# Altium PCB Panel.PcbDoc
Units mil, origin at the board's own origin, x right, y up, seen from the top; angles counter-clockwise.
Board outline 8169.29 x 5688.98 mil, 2 copper layers (Top Layer, Bottom Layer), stack 59.417 mil thick; 12 components, 0 nets, 12 pads, 0 vias.
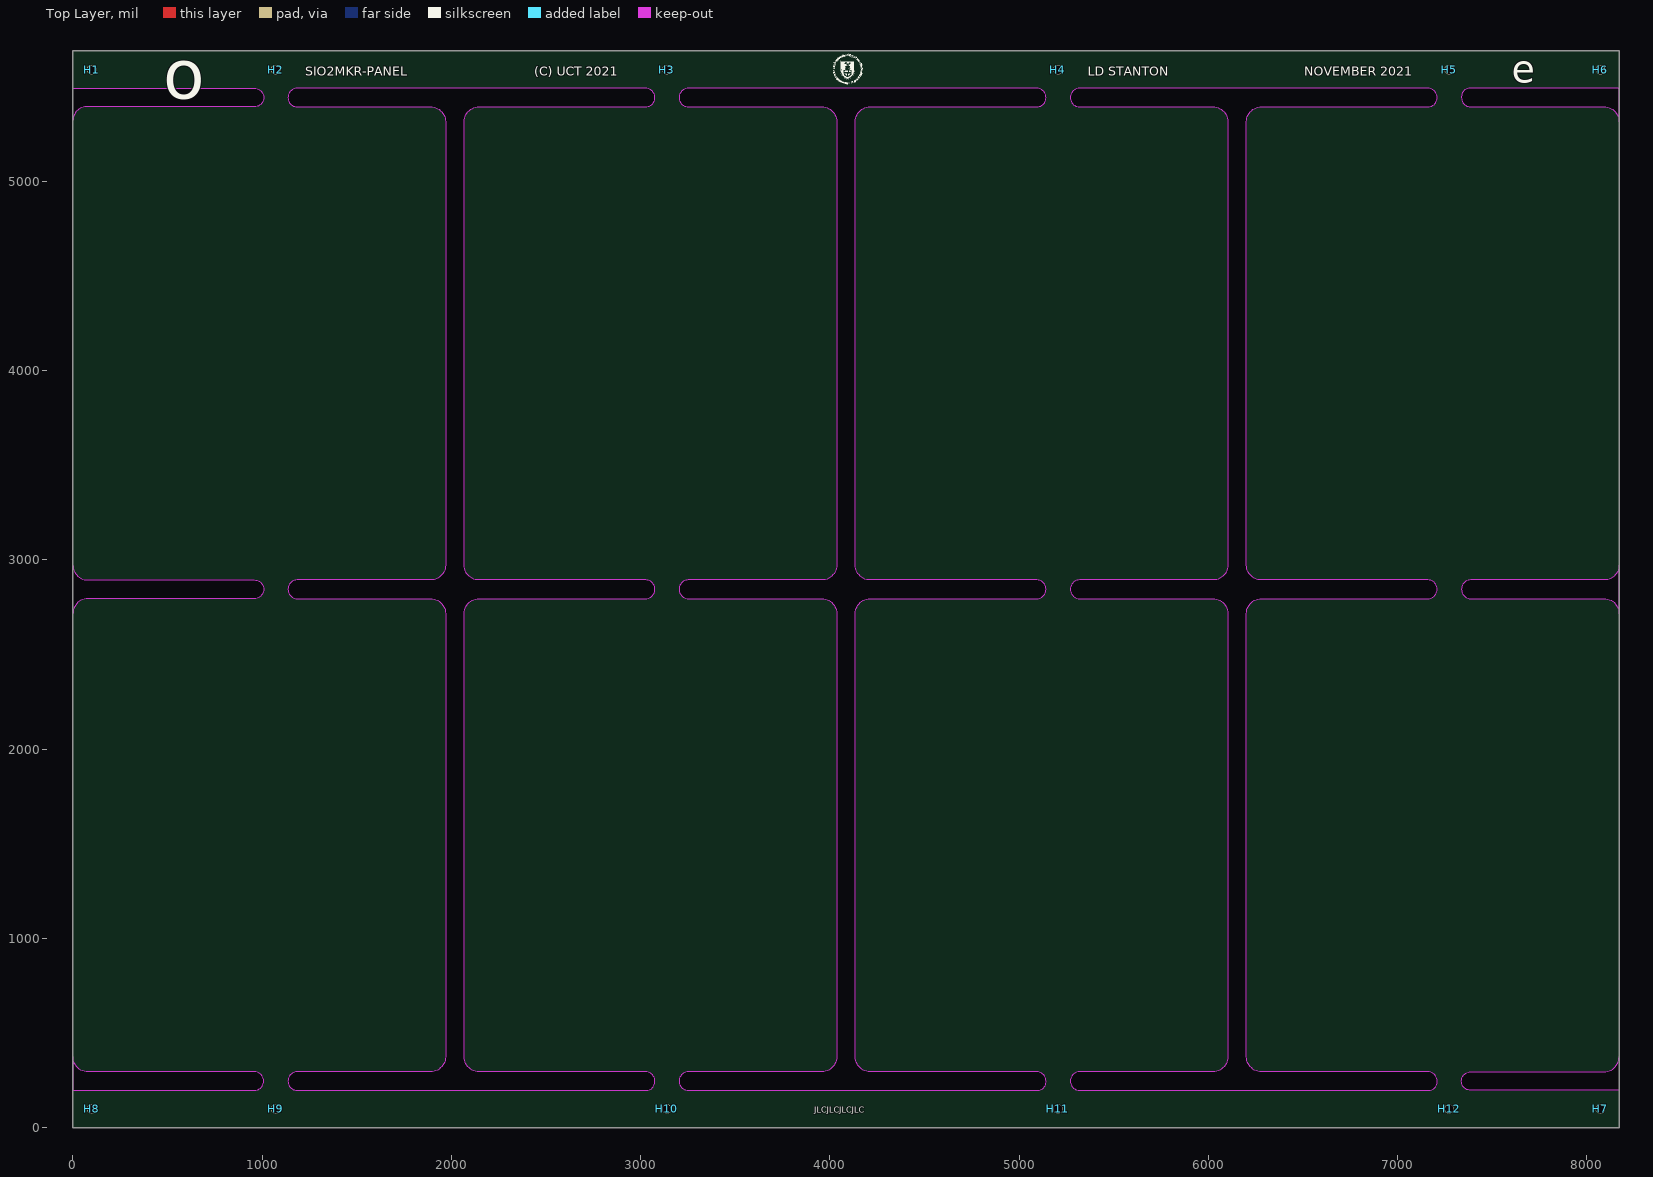
[diagram p0: Top Layer view]
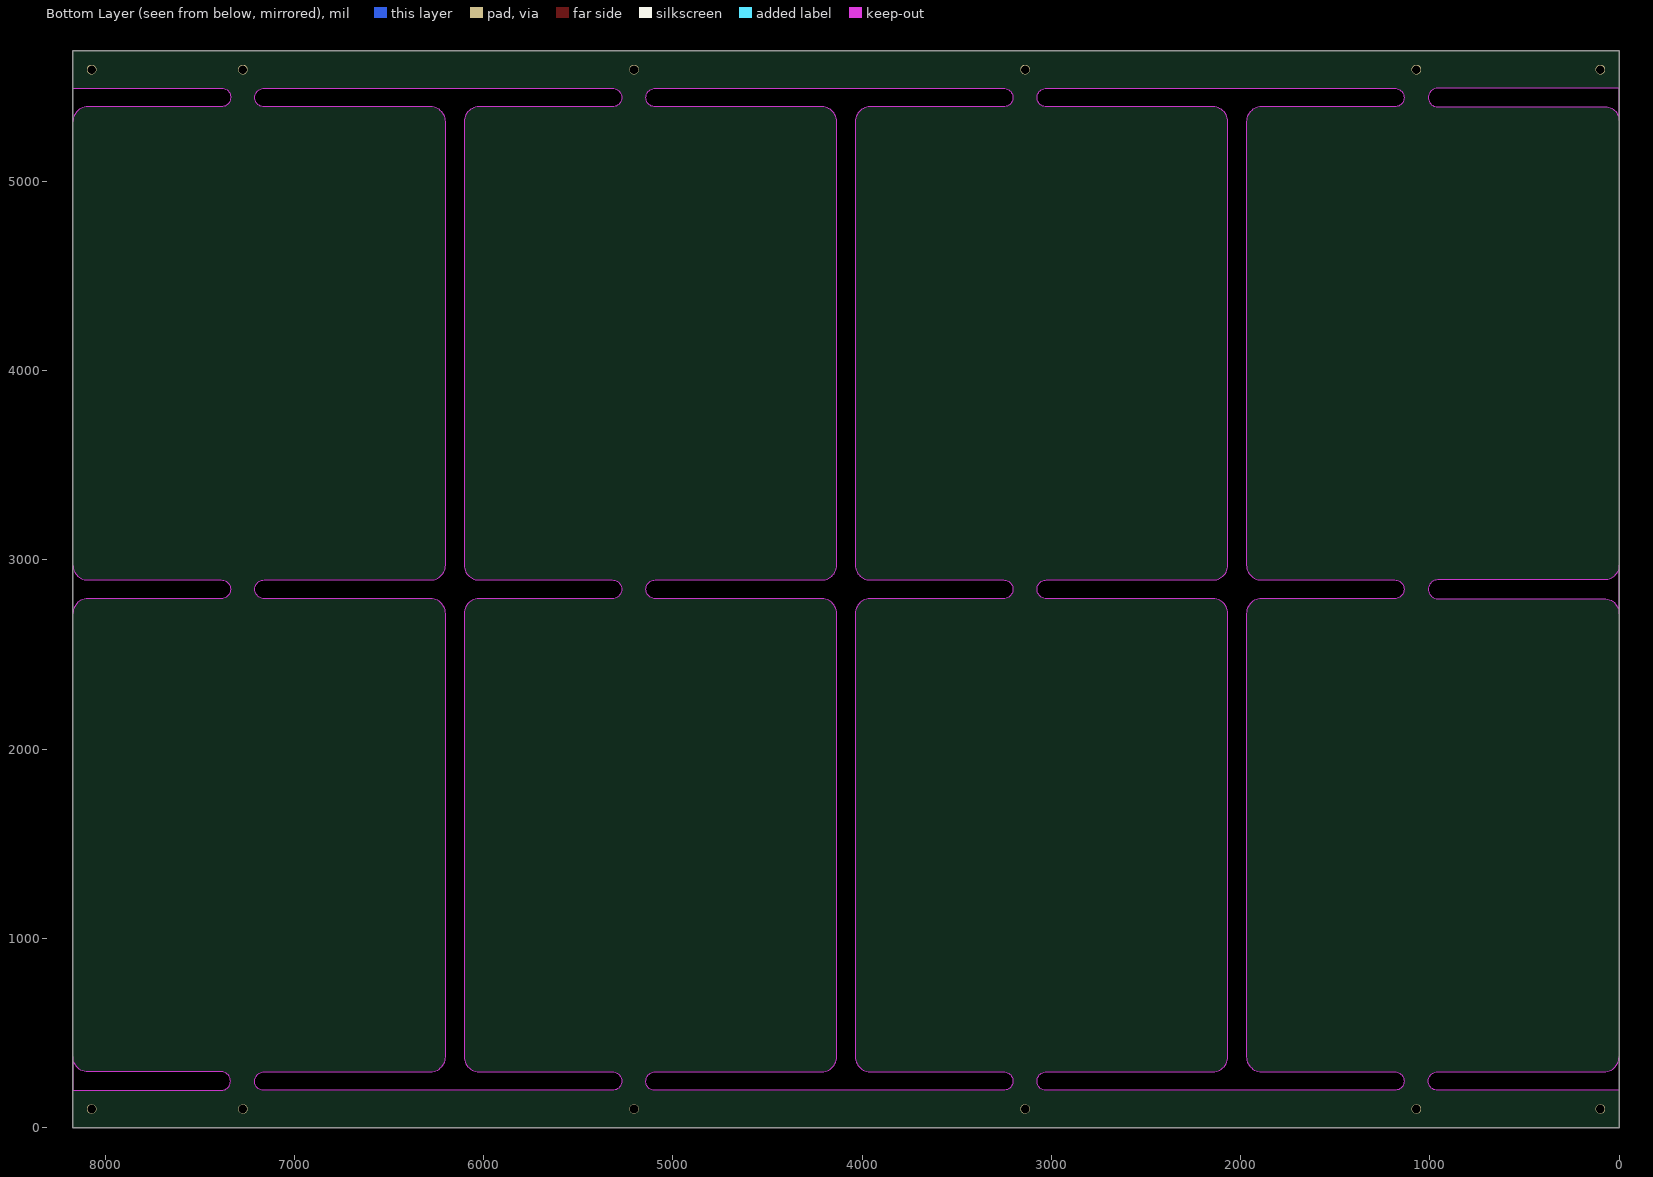
[diagram p1: Bottom Layer view, seen from below]

## Layer stack, top to bottom
Top Solder: solder mask 1, SM-001, Dk 4
Top Layer: signal copper 1.378
Dielectric 1: core 56.6614, Core-043, Dk 4.3
Bottom Layer: signal copper 1.378
Bottom Solder: solder mask 1, SM-001, Dk 4

## Board outline
0,0 8169.29,0 8169.29,5688.98 0,5688.98
cut-out: 7385.83,196.85 cw(c7385.83,246.06) 7336.61,246.06 cw(c7385.83,246.06) 7385.83,295.28 8090.55,295.28 ccw(c8090.55,374.02) 8169.29,374.02 8169.29,196.85
cut-out: 7385.83,2893.7 ccw(c7385.83,2844.49) 7336.61,2844.49 ccw(c7385.83,2844.49) 7385.83,2795.28 8090.55,2795.28 cw(c8090.55,2716.54) 8169.29,2716.54 8169.29,2972.44 cw(c8090.55,2972.44) 8090.55,2893.7
cut-out: 7381.89,5492.13 ccw(c7381.89,5446.85) 7336.61,5446.85 7336.61,5442.91 ccw(c7385.83,5442.91) 7385.83,5393.7 8090.55,5393.7 cw(c8090.55,5314.96) 8169.29,5314.96 8169.29,5492.13
cut-out: 5318.9,295.28 ccw(c5318.9,246.06) 5269.69,246.06 ccw(c5318.9,246.06) 5318.9,196.85 7165.35,196.85 ccw(c7165.35,240.16) 7208.66,240.16 7208.66,246.06 ccw(c7159.45,246.06) 7159.45,295.28 6279.53,295.28 cw(c6279.53,374.02) 6200.79,374.02 6200.79,2716.54 cw(c6279.53,2716.54) 6279.53,2795.28 7159.45,2795.28 ccw(c7159.45,2844.49) 7208.66,2844.49 ccw(c7159.45,2844.49) 7159.45,2893.7 6279.53,2893.7 cw(c6279.53,2972.44) 6200.79,2972.44 6200.79,5314.96 cw(c6279.53,5314.96) 6279.53,5393.7 7159.45,5393.7 ccw(c7159.45,5442.91) 7208.66,5442.91 ccw(c7159.45,5442.91) 7159.45,5492.13 5318.9,5492.13 ccw(c5318.9,5442.91) 5269.69,5442.91 ccw(c5318.9,5442.91) 5318.9,5393.7 6023.62,5393.7 cw(c6023.62,5314.96) 6102.36,5314.96 6102.36,2972.44 cw(c6023.62,2972.44) 6023.62,2893.7 5318.9,2893.7 ccw(c5318.9,2844.49) 5269.69,2844.49 ccw(c5318.9,2844.49) 5318.9,2795.28 6023.62,2795.28 cw(c6023.62,2716.54) 6102.36,2716.54 6102.36,374.02 cw(c6023.62,374.02) 6023.62,295.28
cut-out: 1185.04,295.28 ccw(c1185.04,246.06) 1135.83,246.06 ccw(c1185.04,246.06) 1185.04,196.85 3031.5,196.85 ccw(c3031.5,240.16) 3074.8,240.16 3074.8,246.06 ccw(c3025.59,246.06) 3025.59,295.28 2145.67,295.28 cw(c2145.67,374.02) 2066.93,374.02 2066.93,2716.54 cw(c2145.67,2716.54) 2145.67,2795.28 3025.59,2795.28 ccw(c3025.59,2844.49) 3074.8,2844.49 ccw(c3025.59,2844.49) 3025.59,2893.7 2145.67,2893.7 cw(c2145.67,2972.44) 2066.93,2972.44 2066.93,5314.96 cw(c2145.67,5314.96) 2145.67,5393.7 3025.59,5393.7 ccw(c3025.59,5442.91) 3074.8,5442.91 ccw(c3025.59,5442.91) 3025.59,5492.13 1185.04,5492.13 ccw(c1185.04,5442.91) 1135.83,5442.91 ccw(c1185.04,5442.91) 1185.04,5393.7 1889.76,5393.7 cw(c1889.76,5314.96) 1968.5,5314.96 1968.5,2972.44 cw(c1889.76,2972.44) 1889.76,2893.7 1185.04,2893.7 ccw(c1185.04,2844.49) 1135.83,2844.49 ccw(c1185.04,2844.49) 1185.04,2795.28 1889.76,2795.28 cw(c1889.76,2716.54) 1968.5,2716.54 1968.5,374.02 cw(c1889.76,374.02) 1889.76,295.28
cut-out: 3251.97,295.28 ccw(c3251.97,246.06) 3202.76,246.06 ccw(c3251.97,246.06) 3251.97,196.85 5098.43,196.85 ccw(c5098.43,240.16) 5141.73,240.16 5141.73,246.06 ccw(c5092.52,246.06) 5092.52,295.28 4212.6,295.28 cw(c4212.6,374.02) 4133.86,374.02 4133.86,2716.54 cw(c4212.6,2716.54) 4212.6,2795.28 5092.52,2795.28 ccw(c5092.52,2844.49) 5141.73,2844.49 ccw(c5092.52,2844.49) 5092.52,2893.7 4212.6,2893.7 cw(c4212.6,2972.44) 4133.86,2972.44 4133.86,5314.96 cw(c4212.6,5314.96) 4212.6,5393.7 5092.52,5393.7 ccw(c5092.52,5442.91) 5141.73,5442.91 ccw(c5092.52,5442.91) 5092.52,5492.13 3251.97,5492.13 ccw(c3251.97,5442.91) 3202.76,5442.91 ccw(c3251.97,5442.91) 3251.97,5393.7 3956.69,5393.7 cw(c3956.69,5314.96) 4035.43,5314.96 4035.43,2972.44 cw(c3956.69,2972.44) 3956.69,2893.7 3251.97,2893.7 ccw(c3251.97,2844.49) 3202.76,2844.49 ccw(c3251.97,2844.49) 3251.97,2795.28 3956.69,2795.28 cw(c3956.69,2716.54) 4035.43,2716.54 4035.43,374.02 cw(c3956.69,374.02) 3956.69,295.28
cut-out: 0,196.85 958.66,196.85 ccw(c958.66,246.06) 1007.87,246.06 ccw(c958.66,246.06) 958.66,295.28 78.74,295.28 cw(c78.74,374.02) 0,374.02
cut-out: 958.66,2893.7 cw(c958.66,2844.49) 1007.87,2844.49 cw(c958.66,2844.49) 958.66,2795.28 78.74,2795.28 ccw(c78.74,2716.54) 0,2716.54 0,2972.44 ccw(c78.74,2972.44) 78.74,2893.7
cut-out: 0,5492.13 958.66,5492.13 cw(c958.66,5442.91) 1007.87,5442.91 cw(c958.66,5442.91) 958.66,5393.7 70.99,5393.7 ccw(c70.99,5322.72) 0,5322.72

## Design rules (kind name [scope] priority, off if disabled: settings)
Clearance [All] p1: gap=10 ignorepadtopadclearanceinfootprint=FALSE except(0: Arc-Hole Track-Hole SMDPad-Hole THPad-Hole Via-Hole Fill-Hole Poly-Hole Region-Hole Text-Hole)
PolygonConnect [All] p1: connectstyle=Relief reliefconductorwidth=10 reliefentries=4 polygonreliefangle="90 Angle" airgapwidth=10
RoutingVias [All] p1: holewidth=28 width=50 viastyle="Through Hole" minholewidth=28 minwidth=50 maxholewidth=28 maxwidth=50
SolderMaskExpansion [All] p1: expansion=4 istentingtop=FALSE
Width [All] p1: maxlimit=10 minlimit=10 preferedwidth=10
30 further rules are at their usual default settings.

## Classes and differential pairs
net class H12_Nets: NetH12_1
net class H11_Nets: NetH11_1
net class H10_Nets: NetH10_1
net class H9_Nets: NetH9_1
net class H8_Nets: NetH8_1
net class H7_Nets: NetH7_1
net class H6_Nets: NetH6_1
net class H5_Nets: NetH5_1
net class H4_Nets: NetH4_1
net class H3_Nets: NetH3_1
net class H2_Nets: NetH2_1
net class H1_Nets: NetH1_1
component class Panel: H1 H2 H3 H4 H5 H6 H7 H9 H11

## Components (designator, comment, footprint, x,y, rotation, side; value= is the part's Value field where it differs from the comment)
H1 "Tooling Hole JLCPCB" "Tooling Hole JLCPCB" 98.43,5590.55 r270 top
H2 "Tooling Hole JLCPCB" "Tooling Hole JLCPCB" 1070.87,5590.55 r270 top
H3 "Tooling Hole JLCPCB" "Tooling Hole JLCPCB" 3137.8,5590.55 r270 top
H4 "Tooling Hole JLCPCB" "Tooling Hole JLCPCB" 5204.72,5590.55 r270 top
H5 "Tooling Hole JLCPCB" "Tooling Hole JLCPCB" 7271.65,5590.55 r270 top
H6 "Tooling Hole JLCPCB" "Tooling Hole JLCPCB" 8070.87,5590.55 r270 top
H7 "Tooling Hole JLCPCB" "Tooling Hole JLCPCB" 8070.87,98.43 r270 top
H8 "Tooling Hole JLCPCB" "Tooling Hole JLCPCB" 98.43,98.43 r270 top
H9 "Tooling Hole JLCPCB" "Tooling Hole JLCPCB" 1070.87,98.43 r270 top
H10 "Tooling Hole JLCPCB" "Tooling Hole JLCPCB" 3137.8,98.43 r270 top
H11 "Tooling Hole JLCPCB" "Tooling Hole JLCPCB" 5204.72,98.43 r270 top
H12 "Tooling Hole JLCPCB" "Tooling Hole JLCPCB" 7271.65,98.43 r270 top

## Footprints (in the part's own frame and the unit in brackets; to place one, negate y for a bottom-side part, rotate by r counter-clockwise, add the part's x,y. Pads: shape width x height; smd on the part's side, far side on the other; paste and mask are expansions set on the pad)
"Tooling Hole JLCPCB" [mm] "JLCPCB Specified Tooling Hole 45mil"
  round 1.3 hole 1.153 unplated paste+0.148 mask+0.148: 1(0,0)

## Part data
H1 H2: library part CMP-00028-00006-1, "Mouse Bites 5 Hile Specified by IPC-7351", Size=45.4mil
H3 H4 H5 H6 H7 H8 H9 H10 H11 H12: library part CMP-00028-00000-8, "Tooling Hole Specified by JLCPCB", Size=45.4mil

## Nets (pads, with @x,y where several pads share a name; then routed paths per layer and width w, separated by ;. In a path a pad name is that pad's centre, name@x,y a point inside that pad or via, vN(x,y) a via of type N, cw(c..) or ccw(c..) an arc to the next point about the centre after c; other vN are vias at no path point)
pads on no net: H1.1 H2.1 H3.1 H4.1 H5.1 H6.1 H7.1 H8.1 H9.1 H10.1 H11.1 H12.1

## Silkscreen, mask and mechanical layers (free items; w line width, h text height)
Top Overlay:
  drawing of 90 lines, arcs and shapes, not listed
  text "SIO2MKR-PANEL" at 1228.47,5559.18 h48
  text "(C) UCT 2021" at 2436.61,5559.18 h48
  text "LD STANTON" at 5362.33,5559.18 h48
  text "NOVEMBER 2021" at 6506.49,5559.18 h48
  text "e" at 7601.47,5473.42 h250
  text "o" at 476.58,5349.16 h450
  text "JLCJLCJLCJLC" at 3917.32,78.74 h31.5
Mechanical 1:
  drawing of 742 lines, arcs and shapes, not listed
Drill Drawing:
  drawing of 242 lines, arcs and shapes, not listed
  text "Layer" at 156.24,10737.87 h60
  text "Name" at 566.15,10737.87 h60
  text "Material" at 1895.77,10737.87 h60
  text "Thickness" at 2495.62,10737.87 h60
  text "Constant" at 3145.45,10737.87 h60
  text "Top Overlay" at 566.15,10617.87 h60
  text "Top Solder" at 566.15,10497.87 h60
  text "SM-001" at 1895.77,10497.87 h60
  text "0,025mm" at 2495.62,10497.87 h60
  text "4" at 3145.45,10497.87 h60
  text "Top Surface Finish" at 566.15,10377.87 h60
  text "PbSn" at 1895.77,10377.87 h60
  text "0,020mm" at 2495.62,10377.87 h60
  text "1" at 156.24,10257.87 h60
  text "Top Layer" at 566.15,10257.87 h60
  text "CF-004" at 1895.77,10257.87 h60
  text "0,035mm" at 2495.62,10257.87 h60
  text "Dielectric 1" at 566.15,10137.87 h60
  text "Core-043" at 1895.77,10137.87 h60
  text "1,439mm" at 2495.62,10137.87 h60
  text "4.3" at 3145.45,10137.87 h60
  text "2" at 156.24,10017.87 h60
  text "Bottom Layer" at 566.15,10017.87 h60
  text "CF-004" at 1895.77,10017.87 h60
  text "0,035mm" at 2495.62,10017.87 h60
  text "Bottom Surface Finish" at 566.15,9897.87 h60
  text "PbSn" at 1895.77,9897.87 h60
  text "0,020mm" at 2495.62,9897.87 h60
  text "Bottom Solder" at 566.15,9777.87 h60
  text "SM-001" at 1895.77,9777.87 h60
  text "0,025mm" at 2495.62,9777.87 h60
  text "4" at 3145.45,9777.87 h60
  text "Bottom Overlay" at 566.15,9657.87 h60
  text "Total board thickness:" at 156.24,9537.87 h60
  text "1,600mm" at 2495.62,9537.87 h60
  text "Symbol" at 192.88,9167.79 h72
  text "Count" at 698.76,9167.79 h72
  text "Hole Size" at 1338.59,9167.79 h72
  text "Plated" at 2458.26,9167.79 h72
  text "Hole Type" at 2964.13,9167.79 h72
  text "Via/Pad" at 3697.94,9167.79 h72
  text "Pad Shape" at 4287.79,9167.79 h72
  text "Template" at 5033.58,9167.79 h72
  text "Hole Tolerance (+)" at 6793.05,9167.79 h72
  text "Hole Tolerance (-)" at 8126.66,9167.79 h72
  text "Hole Length" at 9460.27,9167.79 h72
  text "Routed Path Length" at 10579.94,9167.79 h72
  text "12" at 698.76,9017.79 h60
  text "1,153mm (45,39mil)" at 1338.59,9017.79 h60
  text "NPTH" at 2458.26,9017.79 h60
  text "Round" at 2964.13,9017.79 h60
  text "Pad" at 3697.94,9017.79 h60
  text "Rounded" at 4287.79,9017.79 h60
  text "c130hn115m145p145" at 5033.58,9017.79 h60
  text "-" at 9460.27,9017.79 h60
  text "-" at 10579.94,9017.79 h60
  text "16" at 698.76,8867.79 h60
  text "0,700mm (27,56mil)" at 1338.59,8867.79 h60
  text "NPTH" at 2458.26,8867.79 h60
  text "Round" at 2964.13,8867.79 h60
  text "Pad" at 3697.94,8867.79 h60
  text "Rounded" at 4287.79,8867.79 h60
  text "c70hn70" at 5033.58,8867.79 h60
  text "-" at 9460.27,8867.79 h60
  text "-" at 10579.94,8867.79 h60
  text "16" at 698.76,8717.79 h60
  text "0,900mm (35,43mil)" at 1338.59,8717.79 h60
  text "PTH" at 2458.26,8717.79 h60
  text "Slot" at 2964.13,8717.79 h60
  text "Pad" at 3697.94,8717.79 h60
  text "Rounded" at 4287.79,8717.79 h60
  text "r160_200h90_140r100" at 5033.58,8717.79 h60
  text "1,400mm (55,12mil)" at 9460.27,8717.79 h60
  text "0,500mm (19,68mil)" at 10579.94,8717.79 h60
  text "24" at 698.76,8567.79 h60
  text "0,800mm (31,50mil)" at 1338.59,8567.79 h60
  text "PTH" at 2458.26,8567.79 h60
  text "Round" at 2964.13,8567.79 h60
  text "Pad" at 3697.94,8567.79 h60
  text "(Mixed)" at 4287.79,8567.79 h60
  text "(Mixed)" at 5033.58,8567.79 h60
  text "-" at 9460.27,8567.79 h60
  text "-" at 10579.94,8567.79 h60
  text "24" at 698.76,8417.79 h60
  text "0,914mm (36,00mil)" at 1338.59,8417.79 h60
  text "PTH" at 2458.26,8417.79 h60
  text "Round" at 2964.13,8417.79 h60
  text "Pad" at 3697.94,8417.79 h60
  text "Rounded" at 4287.79,8417.79 h60
  text "c152h91" at 5033.58,8417.79 h60
  text "-" at 9460.27,8417.79 h60
  text "-" at 10579.94,8417.79 h60
  text "32" at 698.76,8267.79 h60
  text "0,600mm (23,62mil)" at 1338.59,8267.79 h60
  text "PTH" at 2458.26,8267.79 h60
  text "Slot" at 2964.13,8267.79 h60
  text "Pad" at 3697.94,8267.79 h60
  text "Rounded" at 4287.79,8267.79 h60
  text "r100_170h60_130r100" at 5033.58,8267.79 h60
  text "1,300mm (51,18mil)" at 9460.27,8267.79 h60
  text "0,700mm (27,56mil)" at 10579.94,8267.79 h60
  text "32" at 698.76,8117.79 h60
  text "1,800mm (70,87mil)" at 1338.59,8117.79 h60
  text "PTH" at 2458.26,8117.79 h60
  text "Slot" at 2964.13,8117.79 h60
  text "Pad" at 3697.94,8117.79 h60
  text "Rounded" at 4287.79,8117.79 h60
  text "r250_300h180_220r100(Tol13-8)" at 5033.58,8117.79 h60
  text "0,130mm (5,12mil)" at 6793.05,8117.79 h60
  text "0,080mm (3,15mil)" at 8126.66,8117.79 h60
  text "2,200mm (86,62mil)" at 9460.27,8117.79 h60
  text "0,400mm (15,75mil)" at 10579.94,8117.79 h60
  text "40" at 698.76,7967.79 h60
  text "1,152mm (45,35mil)" at 1338.59,7967.79 h60
  text "NPTH" at 2458.26,7967.79 h60
  text "Round" at 2964.13,7967.79 h60
  text "Pad" at 3697.94,7967.79 h60
  text "Rounded" at 4287.79,7967.79 h60
  text "(Mixed)" at 5033.58,7967.79 h60
  text "0,130mm (5,12mil)" at 6793.05,7967.79 h60
  text "0,080mm (3,15mil)" at 8126.66,7967.79 h60
  text "-" at 9460.27,7967.79 h60
  text "-" at 10579.94,7967.79 h60
  text "40" at 698.76,7817.79 h60
  text "1,200mm (47,24mil)" at 1338.59,7817.79 h60
  text "PTH" at 2458.26,7817.79 h60
  text "Round" at 2964.13,7817.79 h60
  text "Pad" at 3697.94,7817.79 h60
  text "Rounded" at 4287.79,7817.79 h60
  text "c250h120(Tol13-8)" at 5033.58,7817.79 h60
  text "0,130mm (5,12mil)" at 6793.05,7817.79 h60
  text "0,080mm (3,15mil)" at 8126.66,7817.79 h60
  text "-" at 9460.27,7817.79 h60
  text "-" at 10579.94,7817.79 h60
  text "48" at 698.76,7667.79 h60
  text "1,100mm (43,31mil)" at 1338.59,7667.79 h60
  text "PTH" at 2458.26,7667.79 h60
  text "Round" at 2964.13,7667.79 h60
  text "Pad" at 3697.94,7667.79 h60
  text "Rounded" at 4287.79,7667.79 h60
  text "c180h110(Tol13-8)" at 5033.58,7667.79 h60
  text "0,130mm (5,12mil)" at 6793.05,7667.79 h60
  text "0,080mm (3,15mil)" at 8126.66,7667.79 h60
  text "-" at 9460.27,7667.79 h60
  text "-" at 10579.94,7667.79 h60
  text "64" at 698.76,7517.79 h60
  text "0,800mm (31,50mil)" at 1338.59,7517.79 h60
  text "PTH" at 2458.26,7517.79 h60
  text "Round" at 2964.13,7517.79 h60
  text "(Mixed)" at 3697.94,7517.79 h60
  text "Rounded" at 4287.79,7517.79 h60
  text "(Mixed)" at 5033.58,7517.79 h60
  text "0,130mm (5,12mil)" at 6793.05,7517.79 h60
  text "0,080mm (3,15mil)" at 8126.66,7517.79 h60
  text "-" at 9460.27,7517.79 h60
  text "-" at 10579.94,7517.79 h60
  text "80" at 698.76,7367.79 h60
  text "0,787mm (31,00mil)" at 1338.59,7367.79 h60
  text "NPTH" at 2458.26,7367.79 h60
  text "Round" at 2964.13,7367.79 h60
  text "Pad" at 3697.94,7367.79 h60
  text "Rounded" at 4287.79,7367.79 h60
  text "c79hn79m94p94" at 5033.58,7367.79 h60
  text "-" at 9460.27,7367.79 h60
  text "-" at 10579.94,7367.79 h60
  text "160" at 698.76,7217.79 h60
  text "0,900mm (35,43mil)" at 1338.59,7217.79 h60
  text "PTH" at 2458.26,7217.79 h60
  text "Round" at 2964.13,7217.79 h60
  text "Pad" at 3697.94,7217.79 h60
  text "Rounded" at 4287.79,7217.79 h60
  text "c180h90" at 5033.58,7217.79 h60
  text "-" at 9460.27,7217.79 h60
  text "-" at 10579.94,7217.79 h60
  text "160" at 698.76,7067.79 h60
  text "0,900mm (35,43mil)" at 1338.59,7067.79 h60
  text "PTH" at 2458.26,7067.79 h60
  text "Round" at 2964.13,7067.79 h60
  text "Pad" at 3697.94,7067.79 h60
  text "Rounded" at 4287.79,7067.79 h60
  text "c180h90(Tol13-8)" at 5033.58,7067.79 h60
  text "0,130mm (5,12mil)" at 6793.05,7067.79 h60
  text "0,080mm (3,15mil)" at 8126.66,7067.79 h60
  text "-" at 9460.27,7067.79 h60
  text "-" at 10579.94,7067.79 h60
  text "392" at 698.76,6917.79 h60
  text "0,500mm (19,69mil)" at 1338.59,6917.79 h60
  text "PTH" at 2458.26,6917.79 h60
  text "Round" at 2964.13,6917.79 h60
  text "Via" at 3697.94,6917.79 h60
  text "Rounded" at 4287.79,6917.79 h60
  text "v80h50m0mx0(Tol13-8)" at 5033.58,6917.79 h60
  text "0,130mm (5,12mil)" at 6793.05,6917.79 h60
  text "0,080mm (3,15mil)" at 8126.66,6917.79 h60
  text "-" at 9460.27,6917.79 h60
  text "-" at 10579.94,6917.79 h60
  text "1140 Total" at 698.76,6767.79 h60
  text "Slot definitions :" at 192.88,6622.81 h60
  text "Routed Path Length" at 1225.57,6622.81 h60
  text "= Calculated from tool start centre position to tool end centre position." at 2328.24,6622.81 h60
  text "Hole Length" at 1225.57,6522.84 h60
  text "= Routed Path Length + Tool Size = Slot length as defined in the PCB layout" at 1918.37,6522.84 h60
  text "ROUTING WIDTH: 2.5mm" at 275.91,5945.2 h120

## Dimensions
8169.29,5688.98 to 8169.29,0 on Drill Drawing
0,5688.98 to 8169.29,5688.98 on Drill Drawing

## Panel: embedded boards
"PCB.PcbDoc" at 0,295.28, 2 rows x 4 columns, spacing 2598.43 x 2066.93, rotation 0